# Altium PCB PCB_HDMI_GPIO.PcbDoc
Units mm, origin at the board's own origin, x right, y up, seen from the top; angles counter-clockwise.
Board outline 69.16 x 60.3 mm, 2 copper layers (Top Layer, Bottom Layer); 26 components, 141 nets, 305 pads, 149 vias.
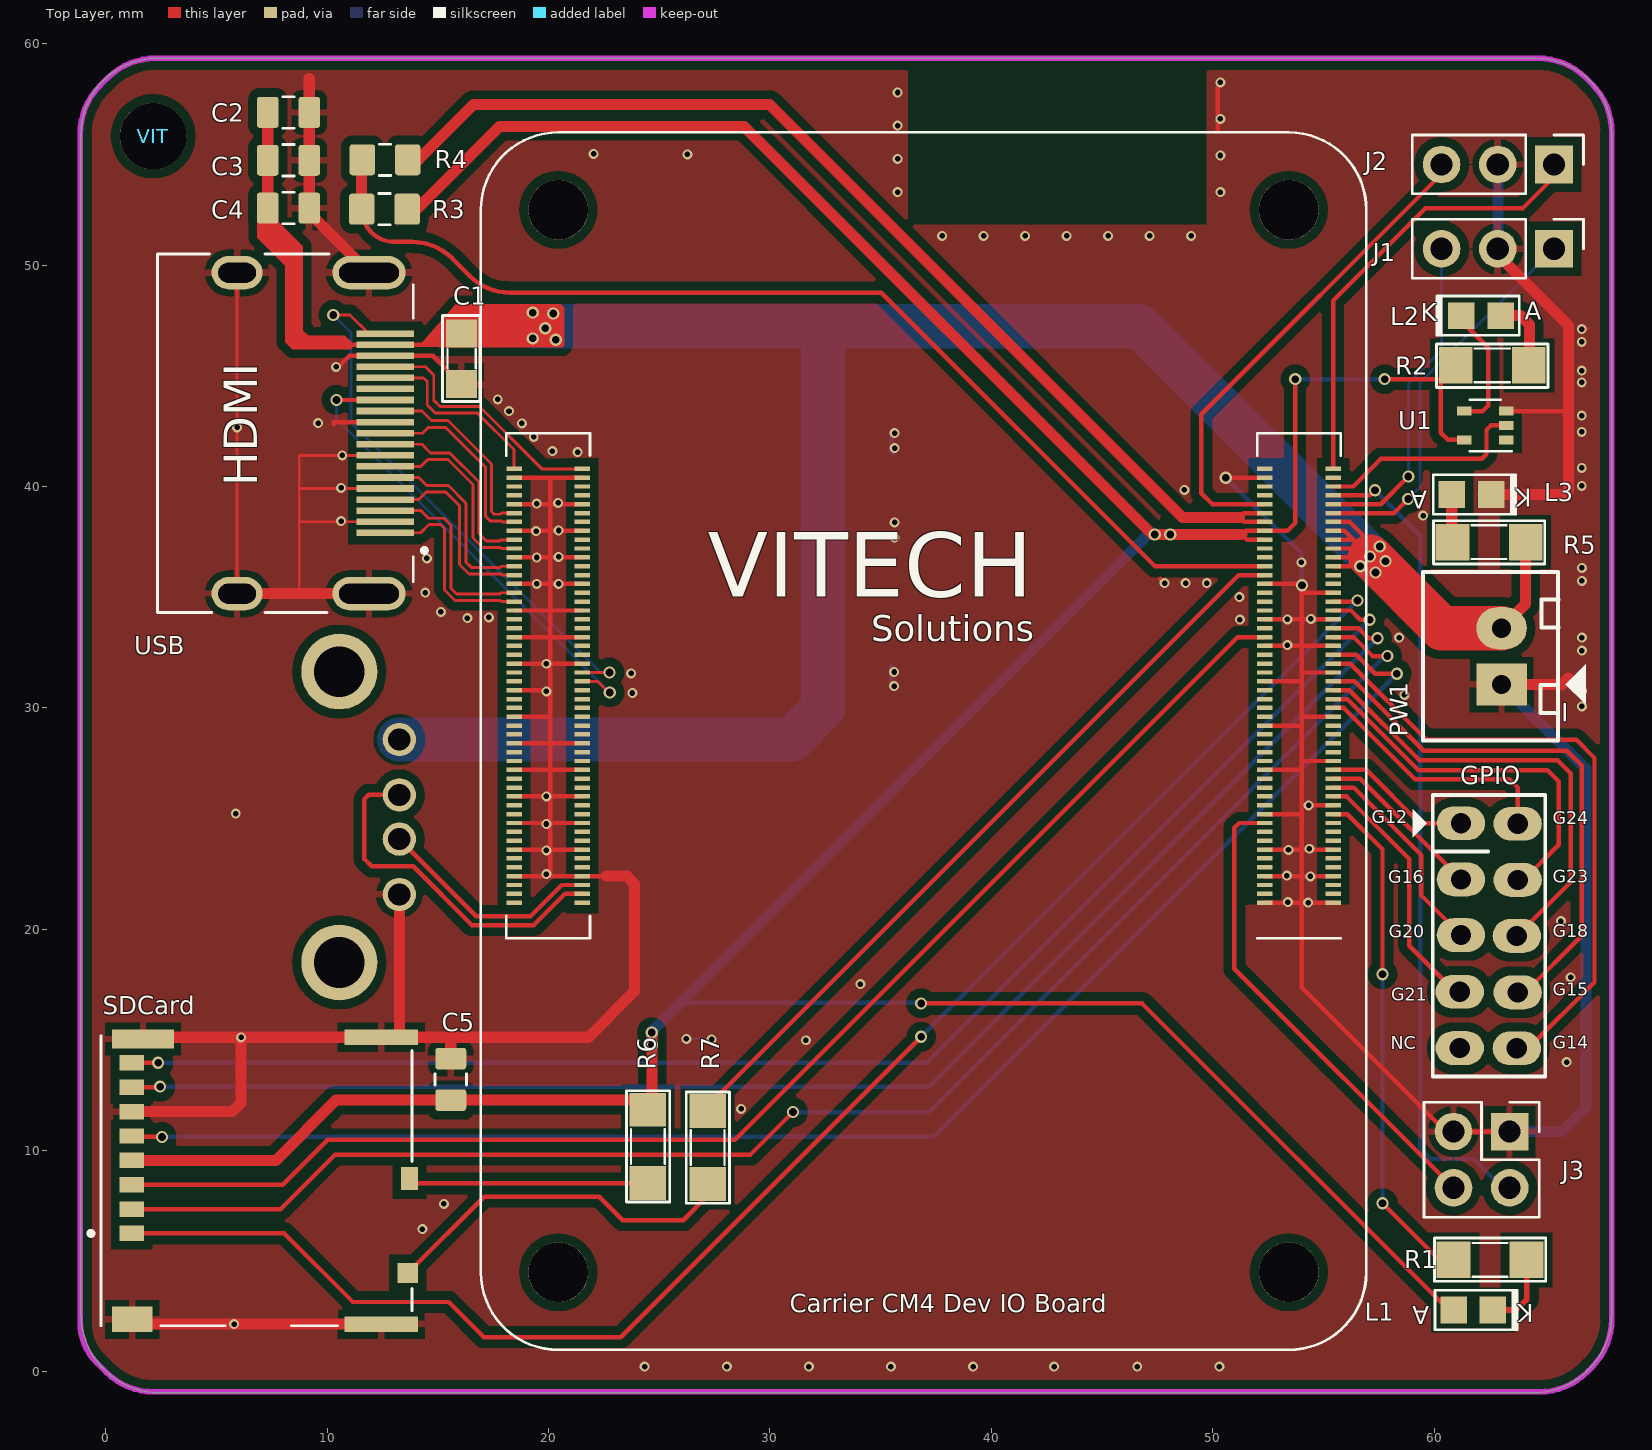
[diagram p0: Top Layer view]
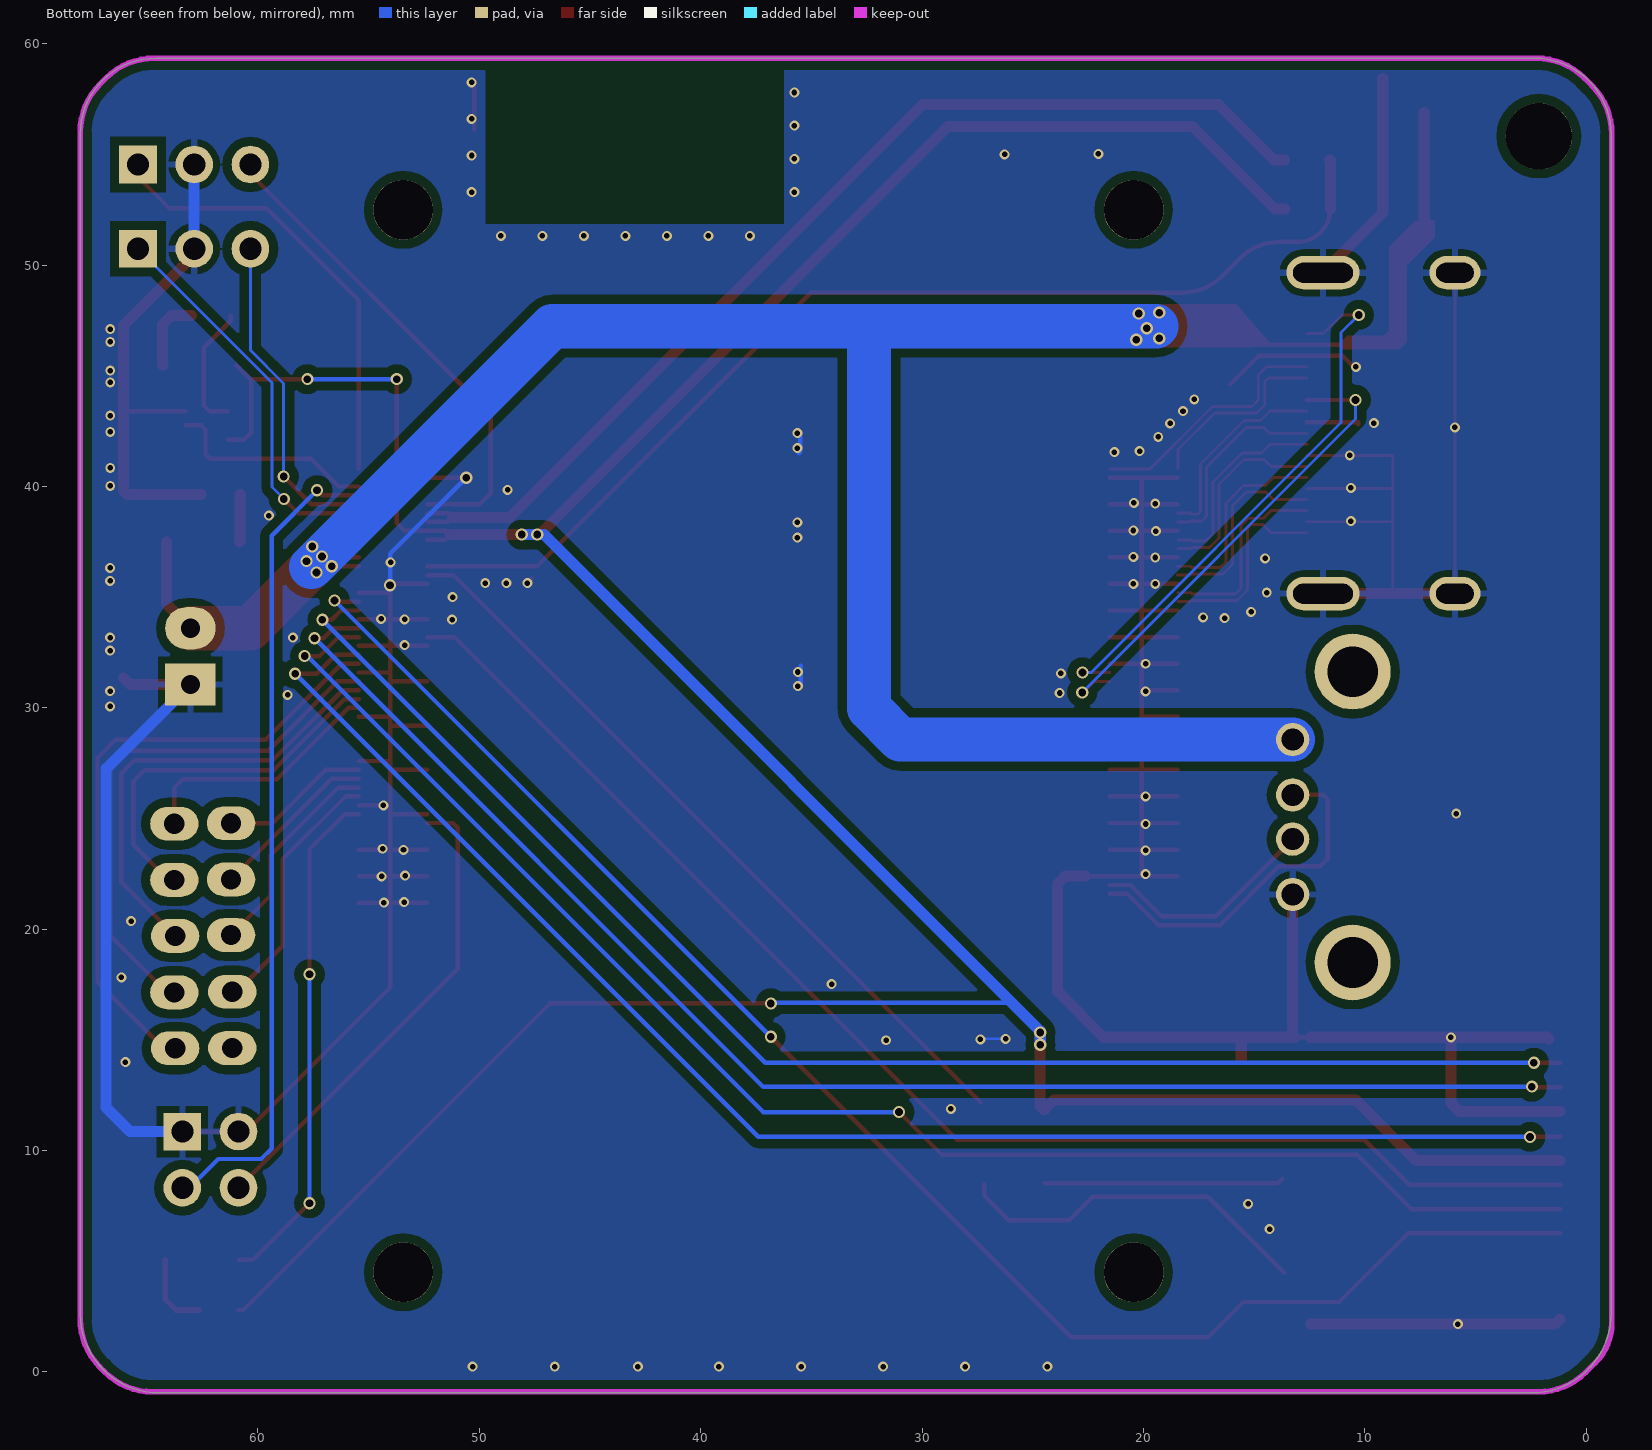
[diagram p1: Bottom Layer view, seen from below]

## Layer stack, top to bottom
Top Solder: solder mask 0.0102, Solder Resist, Dk 3.5
Top Layer: signal copper 0.0356
Dielectric 1: dielectric 0.32, FR-4, Dk 4.8
Bottom Layer: signal copper 0.0356
Bottom Solder: solder mask 0.0102, Solder Resist, Dk 3.5

## Board outline
2.473,-0.949 64.449,-0.949 ccw(c64.449,2.633) 68.03,2.633 68.03,55.922 ccw(c64.601,55.922) 64.601,59.351 2.32,59.351 ccw(c2.32,55.896) -1.134,55.896 -1.134,2.658 ccw(c2.473,2.658)

## Design rules (kind name [scope] priority, off if disabled: settings)
Clearance Clearance_1 [All] p1: gap=0.4
Clearance VCC [InNet('+5V') vs InNet('+5V')] p2: gap=0.3
MatchedLengths CLK_HDMI0 [InNetClass('CLK')] p1: tolerance=2 checknetsindiffpair=FALSE checkdiffpairvsdiffpair=TRUE checkxsignals=TRUE checkothers=TRUE
MatchedLengths D0_P_N [InNetClass('D0_P_N')] p2: tolerance=2 checknetsindiffpair=FALSE checkdiffpairvsdiffpair=TRUE checkxsignals=TRUE checkothers=TRUE
MatchedLengths D1_P_N [InNetClass('D1_P_N')] p3: tolerance=2 checknetsindiffpair=FALSE checkdiffpairvsdiffpair=TRUE checkxsignals=TRUE checkothers=TRUE
MatchedLengths D2_P_N [InNetClass('D2_P_N')] p4: tolerance=2 checknetsindiffpair=FALSE checkdiffpairvsdiffpair=TRUE checkxsignals=TRUE checkothers=TRUE
PolygonConnect Not_Connect_Direct [All vs InComponent('HDMI','C1','C2','C3','C4','C5','SDCard','USB','J1','J2','J3','R3','Module1','PW1')] p1: connectstyle=Relief reliefconductorwidth=0.3 reliefentries=4 polygonreliefangle="90 Angle" airgapwidth=0.3
PolygonConnect vias [All vs isVia] p2: connectstyle=Direct reliefconductorwidth=0.254 reliefentries=4 polygonreliefangle="90 Angle" airgapwidth=0.254
PolygonConnect [IsNamedPolygon('GND') vs IsVia] p3: connectstyle=Relief reliefconductorwidth=0.254 reliefentries=4 polygonreliefangle="90 Angle" airgapwidth=0.254
RoutingVias Via_GND [All] p1: holewidth=0.25 width=0.45 viastyle="Through Hole" minholewidth=0.25 minwidth=0.45 maxholewidth=0.25 maxwidth=0.45
RoutingVias Via_PWR [All] p2: holewidth=0.35 width=0.55 viastyle="Through Hole" minholewidth=0.35 minwidth=0.55 maxholewidth=0.35 maxwidth=0.55
SolderMaskExpansion [All] p1: expansion=0.102
Width [All] p1: maxlimit=2 minlimit=0.13 preferedwidth=0.5
30 further rules are at their usual default settings.

## Classes and differential pairs
net class CLK: HDMI0_CK_N HDMI0_CK_P
net class D0_P_N: HDMI0_D0_N HDMI0_D0_P
net class D1_P_N: HDMI0_D1_N HDMI0_D1_P
net class D2_P_N: HDMI0_D2_N HDMI0_D2_P
net class SDA_SCL: HDMI0_SCL HDMI0_SDA
net class SDCard: SD_CLK SD_CMD SD_DAT0 SD_DAT1 SD_DAT2 SD_DAT3 SD_DET SD_PWR_ON

## Components (designator, comment, footprint, x,y, rotation, side; value= is the part's Value field where it differs from the comment)
C1 "104" SM-CAP-0805 16.069,46.911 r270 top
C2 "10u" C_0805_2012Metric 8.251,56.901 r0 top
C3 "10u" C_0805_2012Metric 8.251,54.741 r0 top
C4 "10u" C_0805_2012Metric 8.251,52.581 r0 top
C5 "10u" C_0805_2012Metric 15.581,13.221 r90 top
"Carrier CM4 Dev IO Board" "ComputeModule4-CM4" Raspberry-Pi-4-Compute-Module 53.441,52.501 r180 top locked (schematic designator Module1)
GPIO "JP5X2" JP5X2 61.201,24.781 r270 top
HDMI "HDMI_A_1.4" HDMI 9.271,42.411 r270 top locked
J1 "Conn_01x03" PinHeader_1x03_P2.54mm_Vertical 65.421,50.741 r270 top
J2 "Conn_01x03" PinHeader_1x03_P2.54mm_Vertical 65.421,54.551 r270 top
J3 "Conn_02x02_Odd_Even" CON2x2 62.147,9.591 r270 top
L1 "RED LED" LED_0805 61.771,2.801 r180 top
L2 "RED LED" LED_0805 62.121,47.721 r0 top
L3 "RED LED" LED_0805 61.691,39.641 r180 top
PW1 "JP2" CON2 63.051,31.061 r90 top
R1 "1k" SM-RES-1206 60.881,5.061 r0 top
R2 "1k" SM-RES-1206 64.281,45.471 r180 top
R3 "0R" R_0805_2012Metric_Pad1.15x1.40mm_HandSolder 12.581,52.531 r180 top
R4 "nf" R_0805_2012Metric_Pad1.15x1.40mm_HandSolder 12.611,54.761 r180 top
R5 "1k" SM-RES-1206 64.141,37.491 r180 top
R6 "1k" SM-RES-1206 24.481,11.841 r270 top
R7 "1k" SM-RES-1206 27.181,11.791 r270 top
SDCard "Micro_SD_Card_Det" SDCARD_MOLEX_503398-1892 6.801,8.641 r90 top
U1 "74LVC1G07_copy" SOT-353_SC-70-5 62.311,42.761 r180 top
USB "USB_Female" USB_Female 11.901,25.071 r270 top
VIT "Comment" VIT 2.134,55.829 r0 top

## Footprints (in the part's own frame and the unit in brackets; to place one, negate y for a bottom-side part, rotate by r counter-clockwise, add the part's x,y. Pads: shape width x height; smd on the part's side, far side on the other; paste and mask are expansions set on the pad)
C_0805_2012Metric [mm]
  rrect25% 0.975x1.4 smd mask+0: 1(-0.937,0) 2(0.937,0)
  silkscreen extent -0.26,-0.71 0.26,0.71
CON2 [mil] "CON2"
  rect 75x90 hole 34: 1(0,0)
  oval 75x90 hole 34: 2(100,0)
  silkscreen extent -100,-150 200,140, body extent -68,-70 168,107, height 236
CON2x2 [mm]
  rect 1.7x1.7 hole 1 paste-1.7: 1(-1.27,1.27)
  rrect100% 1.7x1.7 hole 1 paste-1.7: 2(1.27,1.27) 3(-1.27,-1.27) 4(1.27,-1.27)
  silkscreen extent -2.6,-2.6 2.6,2.6
HDMI [mm]
  rect 0.3x2.6 smd mask+0: 1(4.5,3.345) 2(4,3.345) 3(3.5,3.345) 4(3,3.345) 5(2.5,3.345) 6(2,3.345) 7(1.5,3.345) 8(1,3.345) 9(0.5,3.345) 10(0,3.345) 11(-0.5,3.345) 12(-1,3.345) 13(-1.5,3.345) 14(-2,3.345) 15(-2.5,3.345) 16(-3,3.345) 17(-3.5,3.345) 18(-4,3.345) 19(-4.5,3.345)
  rrect100% 1.5x3.3 hole 2.7 slot 0.9 at 0 deg paste-3.3: SH1(7.25,2.615) SH2(-7.25,2.615)
  rrect100% 1.5x2.3 hole 1.7 slot 0.9 at 0 deg paste-2.3: SH3(-7.25,-3.345) SH4(7.25,-3.345)
  silkscreen extent -8.1,-6.94 8.1,5.22
JP5X2 [mil]
  oval 60x86 hole 36: 1(-0.5,0.5) 2(99.5,0.5) 3(198.5,0.5) 4(299.5,-1.5) 5(399.5,-1.5) 6(0.5,101.5) 7(100.5,101.5) 8(200,100) 9(300.5,101.5) 10(400,100)
  silkscreen extent -51,-85 450,151, body extent -50,-50 450,150, height 335
LED_0805 [mm] "LED"
  rect 1.2x1.2 smd mask+0.076: A(0.889,0) K(-0.889,0)
  silkscreen extent -1.99,-0.89 1.73,0.89, body extent -1.01,-0.62 1.01,0.63, height 1.1
PinHeader_1x03_P2.54mm_Vertical [mm]
  rect 1.7x1.7 hole 1 paste-1.7: 1(0,0)
  rrect100% 1.7x1.7 hole 1 paste-1.7: 2(0,-2.54) 3(0,-5.08)
  silkscreen extent -1.33,-6.41 1.33,1.33
R_0805_2012Metric_Pad1.15x1.40mm_HandSolder [mm]
  rrect22% 1.15x1.4 smd mask+0: 1(-1.025,0) 2(1.025,0)
  silkscreen extent -0.26,-0.71 0.26,0.71
Raspberry-Pi-4-Compute-Module [mm]
  rect 0.7x0.2 smd mask+0: 1(-2,31.3) 2(1.08,31.3) 3(-2,30.9) 4(1.08,30.9) 5(-2,30.5) 6(1.08,30.5) 7(-2,30.1) 8(1.08,30.1) 9(-2,29.7) 10(1.08,29.7) 11(-2,29.3) 12(1.08,29.3) 13(-2,28.9) 14(1.08,28.9) 15(-2,28.5) 16(1.08,28.5) 17(-2,28.1) 18(1.08,28.1) 19(-2,27.7) 20(1.08,27.7) 21(-2,27.3) 22(1.08,27.3) 23(-2,26.9) 24(1.08,26.9) 25(-2,26.5) 26(1.08,26.5) 27(-2,26.1) 28(1.08,26.1) 29(-2,25.7) 30(1.08,25.7) 31(-2,25.3) 32(1.08,25.3) 33(-2,24.9) 34(1.08,24.9) 35(-2,24.5) 36(1.08,24.5) 37(-2,24.1) 38(1.08,24.1) 39(-2,23.7) 40(1.08,23.7) 41(-2,23.3) 42(1.08,23.3) 43(-2,22.9) 44(1.08,22.9) 45(-2,22.5) 46(1.08,22.5) 47(-2,22.1) 48(1.08,22.1) 49(-2,21.7) 50(1.08,21.7) 51(-2,21.3) 52(1.08,21.3) 53(-2,20.9) 54(1.08,20.9) 55(-2,20.5) 56(1.08,20.5) 57(-2,20.1) 58(1.08,20.1) 59(-2,19.7) 60(1.08,19.7) 61(-2,19.3) 62(1.08,19.3) 63(-2,18.9) 64(1.08,18.9) 65(-2,18.5) 66(1.08,18.5) 67(-2,18.1) 68(1.08,18.1) 69(-2,17.7) 70(1.08,17.7) 71(-2,17.3) 72(1.08,17.3) 73(-2,16.9) 74(1.08,16.9) 75(-2,16.5) 76(1.08,16.5) 77(-2,16.1) 78(1.08,16.1) 79(-2,15.7) 80(1.08,15.7) 81(-2,15.3) 82(1.08,15.3) 83(-2,14.9) 84(1.08,14.9) 85(-2,14.5) 86(1.08,14.5) 87(-2,14.1) 88(1.08,14.1) 89(-2,13.7) 90(1.08,13.7) 91(-2,13.3) 92(1.08,13.3) 93(-2,12.9) 94(1.08,12.9) 95(-2,12.5) 96(1.08,12.5) 97(-2,12.1) 98(1.08,12.1) 99(-2,11.7) 100(1.08,11.7) 101(31.92,31.3) 102(35,31.3) 103(31.92,30.9) 104(35,30.9) 105(31.92,30.5) 106(35,30.5) 107(31.92,30.1) 108(35,30.1) 109(31.92,29.7) 110(35,29.7) 111(31.92,29.3) 112(35,29.3) 113(31.92,28.9) 114(35,28.9) 115(31.92,28.5) 116(35,28.5) 117(31.92,28.1) 118(35,28.1) 119(31.92,27.7) 120(35,27.7) 121(31.92,27.3) 122(35,27.3) 123(31.92,26.9) 124(35,26.9) 125(31.92,26.5) 126(35,26.5) 127(31.92,26.1) 128(35,26.1) 129(31.92,25.7) 130(35,25.7) 131(31.92,25.3) 132(35,25.3) 133(31.92,24.9) 134(35,24.9) 135(31.92,24.5) 136(35,24.5) 137(31.92,24.1) 138(35,24.1) 139(31.92,23.7) 140(35,23.7) 141(31.92,23.3) 142(35,23.3) 143(31.92,22.9) 144(35,22.9) 145(31.92,22.5) 146(35,22.5) 147(31.92,22.1) 148(35,22.1) 149(31.92,21.7) 150(35,21.7) 151(31.92,21.3) 152(35,21.3) 153(31.92,20.9) 154(35,20.9) 155(31.92,20.5) 156(35,20.5) 157(31.92,20.1) 158(35,20.1) 159(31.92,19.7) 160(35,19.7) 161(31.92,19.3) 162(35,19.3) 163(31.92,18.9) 164(35,18.9) 165(31.92,18.5) 166(35,18.5) 167(31.92,18.1) 168(35,18.1) 169(31.92,17.7) 170(35,17.7) 171(31.92,17.3) 172(35,17.3) 173(31.92,16.9) 174(35,16.9) 175(31.92,16.5) 176(35,16.5) 177(31.92,16.1) 178(35,16.1) 179(31.92,15.7) 180(35,15.7) 181(31.92,15.3) 182(35,15.3) 183(31.92,14.9) 184(35,14.9) 185(31.92,14.5) 186(35,14.5) 187(31.92,14.1) 188(35,14.1) 189(31.92,13.7) 190(35,13.7) 191(31.92,13.3) 192(35,13.3) 193(31.92,12.9) 194(35,12.9) 195(31.92,12.5) 196(35,12.5) 197(31.92,12.1) 198(35,12.1) 199(31.92,11.7) 200(35,11.7)
  round 2.7 hole 2.7 paste-2.7 mask+1.7: Un1(0,0) Un2(33,48) Un3(33,0) Un4(0,48)
  silkscreen extent -3.5,-3.5 36.5,51.5
SDCARD_MOLEX_503398-1892 [mm]
  rect 0.7x1.1 smd mask+0: 1(-2.38,5.625) 2(-1.28,5.625) 3(-0.18,5.625) 4(0.92,5.625) 5(2.02,5.625) 6(3.12,5.625) 7(4.22,5.625) 8(5.32,5.625)
  rect 0.9x0.93 smd mask+0: 9(-4.17,-6.84)
  rect 1.05x0.78 smd mask+0: 10(0.095,-6.915)
  rect 0.7x3.33 smd mask+0: 11(-6.48,-5.64) 11(6.48,-5.64)
  rect 1.14x1.83 smd mask+0: 11(-6.26,5.61)
  rect 0.86x2.8 smd mask+0: 11(6.4,5.125)
  silkscreen extent -6.55,-7.02 6.55,7.57
SM-CAP-0805 [mil]
  rect 50x55 smd: 1(0,0) 2(90,0)
  silkscreen extent -32,-34 121,33, body extent 6,-25 84,25, height 31
SM-RES-1206 [mil]
  rect 60x65 smd: 1(0,0) 2(130,0)
  silkscreen extent -34,-38 164,39, body extent 2,-31 128,32, height 40
SOT-353_SC-70-5 [mm]
  rect 0.65x0.4 smd mask+0: 1(-0.95,0.65) 2(-0.95,0) 3(-0.95,-0.65) 4(0.95,-0.65) 5(0.95,0.65)
  silkscreen extent -1.2,-1.16 0.7,1.16
USB_Female [mm]
  round 1.508 / inner round 0 / far side round 1.508 hole 1: D+(1,1.355) D-(-1,1.355) GND(3.5,1.355) VBUS(-3.5,1.355)
  round 3.429 / inner round 0 / far side round 3.429 hole 2.286: P1(-6.57,-1.355) P22(6.57,-1.355)
VIT [mm] "VIT"
  round 3 hole 3: VIT1(0,0)

## Part data
C1: library part CN
C2 C3 C4 C5: library part C
L1 L2 L3: library part LED-RED_10mA-0805, "Red 621nm LED Indication - Discrete 2V 0805 (2012 Metric)"
PW1: library part Con2, "Connector 2"
R1 R2 R5 R6 R7: library part R, "Resistor 1/4W"
R3 R4: library part R

## Via types
v1: diameter 0.45, hole 0.25, Top Layer to Bottom Layer, tented both sides, 111 vias
v2: diameter 0.55, hole 0.35, Top Layer to Bottom Layer, tented both sides, 38 vias

## Nets (pads, with @x,y where several pads share a name; then routed paths per layer and width w, separated by ;. In a path a pad name is that pad's centre, name@x,y a point inside that pad or via, vN(x,y) a via of type N, cw(c..) or ccw(c..) an arc to the next point about the centre after c; other vN are vias at no path point)
+1.8V: "Carrier CM4 Dev IO Board.88" "Carrier CM4 Dev IO Board.90" R4.1 | length 48.8
  Top Layer w0.2: 52.361,38.401 51.401,38.401 51.201,38.601 51.401,38.801 52.361,38.801
  Top Layer w0.5: R4.1 14.111,54.761 16.601,57.251 29.981,57.251 48.631,38.601 51.201,38.601
+3.3V: "Carrier CM4 Dev IO Board.84" "Carrier CM4 Dev IO Board.86" C5.1 L1.A R2.2 R3.1 R6.1 SDCard.4 U1.5 | length 173.9
  Top Layer w0.2: v2@36.961,16.651 46.811,16.651 60.661,2.801 L1.A ; 52.361,37.601 51.551,37.601 51.321,37.831 51.491,38.001 52.361,38.001 53.376,38.001 53.728,38.353 v2(53.728,44.853) v2@53.728,44.913 ; v2(57.769,44.853) 60.361,44.853 R2.2 60.305,44.797 60.305,42.437 60.631,42.111 U1.5
  Top Layer w0.5: SDCard.4 7.681,9.561 10.403,12.284 C5.1 24.038,12.284 R6.1 24.681,12.041 v2@24.681,15.341 ; R3.1 14.051,52.531 17.791,56.271 28.831,56.271 47.271,37.831 v2(48.081,37.831) 51.321,37.831
  Bottom Layer w0.2: v2(24.661,14.781) 24.661,15.371 25.961,16.671 36.811,16.671 v2(36.831,16.651) v2@36.961,16.651 ; v2(53.728,44.853) v2(57.769,44.853)
  Bottom Layer w0.5: v2(24.661,14.781) v2(24.661,15.341) 24.661,15.411 47.081,37.831 v2(48.081,37.831)
  other v2: 47.381,37.831
+5V: "Carrier CM4 Dev IO Board.77" "Carrier CM4 Dev IO Board.79" "Carrier CM4 Dev IO Board.81" "Carrier CM4 Dev IO Board.83" "Carrier CM4 Dev IO Board.85" "Carrier CM4 Dev IO Board.87" C1.1 C2.1 C3.1 C4.1 HDMI.18 PW1.2 R5.1 USB.VBUS | length 117.7
  Top Layer w0.2: 10.871,46.411 HDMI.18 C1.1@15.714,46.411 ; 55.441,36.401 v2(56.671,36.401) v2@57.071,36.801 ; 55.441,36.801 v2@57.071,36.801 ; 55.441,37.201 56.751,37.201 ; 55.441,37.601 56.351,37.601 ; 55.441,38.001 55.951,38.001 56.351,37.601 ; 55.441,38.401 56.191,38.401 57.301,37.291 v2(57.551,37.291) 57.551,37.281 v2(57.111,36.841) ; 56.351,37.601 56.751,37.201 ; 56.751,37.201 v2(57.111,36.841) ; v2@57.071,36.801 v2(57.111,36.841)
  Top Layer w0.5: C2.1 C3.1 C4.1 7.313,51.757 ccw(c8.227,51.757) 7.314,51.738 ccw(c8.227,51.757) 7.581,51.111 8.251,50.441 cw(c7.432,49.621) 8.591,49.621 8.591,46.851 ; PW1.2 64.141,34.691 R5.1
  Top Layer w2: v2(57.111,36.841) 60.351,33.601 PW1.2
  Bottom Layer w2: USB.VBUS 30.986,28.571 32.392,29.977 32.392,47.245 ; 19.421,47.245 32.392,47.245 ; 57.591,36.361 46.707,47.245 32.392,47.245
  other v2: 57.361,36.121 57.811,36.631 20.324,46.634 19.286,46.695 19.846,47.153 20.212,47.815 19.286,47.856
AIN0: "Carrier CM4 Dev IO Board.96"
AIN1: "Carrier CM4 Dev IO Board.94"
BT_NDIS: "Carrier CM4 Dev IO Board.91" J1.3 | length 14.8
  Top Layer w0.2: 55.441,39.201 57.591,39.201 v2(58.841,40.451)
  Bottom Layer w0.13: v2(58.841,40.451) 58.841,44.658 60.341,46.158 J1.3
CAM0_C_N: "Carrier CM4 Dev IO Board.140"
CAM0_C_P: "Carrier CM4 Dev IO Board.142"
CAM0_D0_N: "Carrier CM4 Dev IO Board.128"
CAM0_D0_P: "Carrier CM4 Dev IO Board.130"
CAM0_D1_N: "Carrier CM4 Dev IO Board.134"
CAM0_D1_P: "Carrier CM4 Dev IO Board.136"
CAM1_C_N: "Carrier CM4 Dev IO Board.127"
CAM1_C_P: "Carrier CM4 Dev IO Board.129"
CAM1_D0_N: "Carrier CM4 Dev IO Board.115"
CAM1_D0_P: "Carrier CM4 Dev IO Board.117"
CAM1_D1_N: "Carrier CM4 Dev IO Board.121"
CAM1_D1_P: "Carrier CM4 Dev IO Board.123"
CAM1_D2_N: "Carrier CM4 Dev IO Board.133"
CAM1_D2_P: "Carrier CM4 Dev IO Board.135"
CAM1_D3_N: "Carrier CM4 Dev IO Board.139"
CAM1_D3_P: "Carrier CM4 Dev IO Board.141"
DSI0_C_N: "Carrier CM4 Dev IO Board.169"
DSI0_C_P: "Carrier CM4 Dev IO Board.171"
DSI0_D0_N: "Carrier CM4 Dev IO Board.157"
DSI0_D0_P: "Carrier CM4 Dev IO Board.159"
DSI0_D1_N: "Carrier CM4 Dev IO Board.163"
DSI0_D1_P: "Carrier CM4 Dev IO Board.165"
DSI1_C_N: "Carrier CM4 Dev IO Board.187"
DSI1_C_P: "Carrier CM4 Dev IO Board.189"
DSI1_D0_N: "Carrier CM4 Dev IO Board.175"
DSI1_D0_P: "Carrier CM4 Dev IO Board.177"
DSI1_D1_N: "Carrier CM4 Dev IO Board.181"
DSI1_D1_P: "Carrier CM4 Dev IO Board.183"
DSI1_D2_N: "Carrier CM4 Dev IO Board.193"
DSI1_D2_P: "Carrier CM4 Dev IO Board.195"
DSI1_D3_N: "Carrier CM4 Dev IO Board.194"
DSI1_D3_P: "Carrier CM4 Dev IO Board.196"
EEPROM_NWP: "Carrier CM4 Dev IO Board.20" J3.4 | length 21.8
  Top Layer w0.2: 52.361,24.801 51.201,24.801 50.981,24.581 50.981,18.217 J3.4
ETH_LEDG: "Carrier CM4 Dev IO Board.15"
ETH_LEDY: "Carrier CM4 Dev IO Board.17"
GLOBAL_EN: "Carrier CM4 Dev IO Board.99" J2.1 | length 20.5
  Top Layer w0.2: 55.441,40.801 55.441,48.394 59.628,52.581 64.021,52.581 65.421,53.981 J2.1
GND: "Carrier CM4 Dev IO Board.1" "Carrier CM4 Dev IO Board.2" "Carrier CM4 Dev IO Board.7" "Carrier CM4 Dev IO Board.8" "Carrier CM4 Dev IO Board.13" "Carrier CM4 Dev IO Board.14" "Carrier CM4 Dev IO Board.22" "Carrier CM4 Dev IO Board.23" "Carrier CM4 Dev IO Board.32" "Carrier CM4 Dev IO Board.33" "Carrier CM4 Dev IO Board.42" "Carrier CM4 Dev IO Board.43" "Carrier CM4 Dev IO Board.52" "Carrier CM4 Dev IO Board.53" "Carrier CM4 Dev IO Board.59" "Carrier CM4 Dev IO Board.60" "Carrier CM4 Dev IO Board.65" "Carrier CM4 Dev IO Board.66" "Carrier CM4 Dev IO Board.71" "Carrier CM4 Dev IO Board.74" "Carrier CM4 Dev IO Board.98" "Carrier CM4 Dev IO Board.107" "Carrier CM4 Dev IO Board.108" "Carrier CM4 Dev IO Board.113" "Carrier CM4 Dev IO Board.114" "Carrier CM4 Dev IO Board.119" "Carrier CM4 Dev IO Board.120" "Carrier CM4 Dev IO Board.125" "Carrier CM4 Dev IO Board.126" "Carrier CM4 Dev IO Board.131" "Carrier CM4 Dev IO Board.132" "Carrier CM4 Dev IO Board.137" "Carrier CM4 Dev IO Board.138" "Carrier CM4 Dev IO Board.144" "Carrier CM4 Dev IO Board.150" "Carrier CM4 Dev IO Board.155" "Carrier CM4 Dev IO Board.156" "Carrier CM4 Dev IO Board.161" "Carrier CM4 Dev IO Board.162" "Carrier CM4 Dev IO Board.167" "Carrier CM4 Dev IO Board.168" "Carrier CM4 Dev IO Board.173" "Carrier CM4 Dev IO Board.174" "Carrier CM4 Dev IO Board.179" "Carrier CM4 Dev IO Board.180" "Carrier CM4 Dev IO Board.185" "Carrier CM4 Dev IO Board.186" "Carrier CM4 Dev IO Board.191" "Carrier CM4 Dev IO Board.192" "Carrier CM4 Dev IO Board.197" "Carrier CM4 Dev IO Board.198" C1.2 C2.2 C3.2 C4.2 C5.2 HDMI.2 HDMI.5 HDMI.8 HDMI.11 HDMI.17 HDMI.SH1 HDMI.SH2 HDMI.SH3 HDMI.SH4 J1.2 J2.2 J3.1 J3.3 L3.K PW1.1 SDCard.6 SDCard.11 U1.3 USB.GND | length 304.3
  Top Layer w0.13: HDMI.SH4 v1(5.926,42.672) HDMI.SH3 ; 8.738,35.161 8.738,38.372 ; HDMI.2 8.777,38.411 8.738,38.372 ; HDMI.5 8.785,39.911 8.738,39.864 ; HDMI.8 v1(10.679,41.411) 8.742,41.411 8.738,41.407 8.738,39.864 ; 8.738,38.372 8.738,39.864
  Top Layer w0.2: 10.296,42.815 10.296,42.911 HDMI.11 ; 10.626,45.533 11.004,45.911 HDMI.17 14.783,45.911 C1.2 ; SDCard.11@12.441,15.121 13.161,15.121 SDCard.11@13.256,15.216 ; v1@14.427,35.179 v1(14.427,35.204) ; 18.441,22.401 v1@20.071,22.401 ; 18.441,23.601 v1@20.071,23.601 ; 18.441,24.801 v1@20.071,24.801 ; 18.441,26.001 v1@20.071,26.001 ; 18.441,27.201 20.071,27.201 ; 18.441,28.401 20.071,28.401 ; 18.441,29.601 20.021,29.601 cw(c20.021,29.551) 20.071,29.551 ; 18.441,30.801 20.021,30.801 cw(c20.021,30.751) v1@20.071,30.751 ; 18.441,32.001 v1@20.071,32.001 ; 18.441,33.201 20.071,33.201 ; 18.441,34.401 20.071,34.401 ; 18.441,35.601 20.071,35.601 ; 18.441,36.801 20.071,36.801 ; 18.441,38.001 20.071,38.001 ; 18.441,39.201 20.071,39.201 ; 18.441,40.401 20.072,40.401 ; 21.521,23.601 v1@20.071,23.601 ; 21.521,24.801 v1@20.071,24.801 ; 21.521,26.001 v1@20.071,26.001 ; 21.521,27.201 20.071,27.201 ; 21.521,28.401 20.071,28.401 ; 21.521,32.001 v1@20.071,32.001 ; 21.521,33.201 20.071,33.201 ; 21.521,34.401 20.071,34.401 ; 21.521,35.601 20.071,35.601 ; 21.521,36.801 20.071,36.801 ; 21.521,38.001 20.071,38.001 ; 21.521,39.201 20.071,39.201 ; 21.521,40.401 20.072,40.401 ; 22.611,22.401 21.521,22.401 v1@20.071,22.401 ; 47.625,35.839 v1(47.828,35.636) ; v1@48.717,39.751 v1(48.717,39.853) ; v1@49.733,35.761 v1@49.835,35.761 ; 50.227,56.125 50.227,58.03 v1@50.455,58.259 ; v2(50.591,40.401) 52.361,40.401 ; 52.361,21.201 54.021,21.201 ; 52.361,22.401 54.021,22.401 ; 52.361,23.601 54.021,23.601 ; 52.361,25.201 54.021,25.201 ; 52.361,27.201 53.981,27.201 ; 52.361,29.201 53.991,29.201 54.021,29.171 ; 52.361,31.201 53.931,31.201 54.021,31.111 ; 52.361,32.801 54.021,32.801 ; 52.361,34.001 54.021,34.001 ; 52.361,35.601 v2@54.021,35.601 ; v2@54.021,35.541 54.021,35.201 ; 55.441,21.201 54.021,21.201 ; 55.441,22.401 54.021,22.401 ; 55.441,23.601 54.021,23.601 ; 55.441,25.601 54.031,25.601 54.021,25.611 ; 55.441,27.601 54.061,27.601 54.021,27.561 ; 55.441,29.601 54.031,29.601 54.021,29.591 ; 55.441,31.601 54.061,31.601 54.021,31.561 ; 55.441,32.801 54.021,32.801 ; 55.441,34.001 54.021,34.001 ; 55.441,35.201 54.021,35.201 ; v1(58.42,33.172) v1@58.42,33.198 ; v1@58.547,30.683 58.639,30.591 v1(58.656,30.591) v1@58.716,30.531 ; v1@59.436,38.659 59.487,38.659 v1(59.512,38.684) v1@59.588,38.608 ; U1.3 65.792,43.411 ; J3.1 J3.3 60.531,10.861 54.021,17.371 54.021,21.201 ; v1@66.548,47.117 v1@66.878,47.117 ; v1@20.071,22.401 v1@20.071,23.601 ; v1@20.071,23.601 v1@20.071,24.801 ; v1@20.071,24.801 v1@20.071,26.001 ; v1@20.071,26.001 20.071,27.201 ; 20.071,27.201 20.071,28.401 ; 20.071,28.401 20.071,29.551 ; 20.071,29.551 v1@20.071,30.751 ; v1@20.071,30.751 v1@20.071,32.001 ; v1@20.071,32.001 20.071,33.201 ; 20.071,33.201 20.071,34.401 ; 20.071,34.401 20.071,35.601 ; 20.071,35.601 20.071,36.801 ; 20.071,36.801 20.071,38.001 ; 20.071,38.001 20.071,39.201 ; 20.071,39.201 20.071,40.4 20.072,40.401 ; 54.021,21.201 54.021,22.401 ; 54.021,22.401 54.021,23.601 ; 54.021,23.601 54.021,25.201 ; 54.021,25.201 54.021,25.611 ; 54.021,25.611 54.021,27.561 ; 54.021,27.561 54.021,29.171 ; 54.021,29.171 54.021,29.591 ; 54.021,29.591 54.021,31.111 ; 54.021,31.111 54.021,31.561 ; 54.021,31.561 54.021,32.801 ; 54.021,32.801 54.021,34.001 ; 54.021,34.001 54.021,35.201
  Top Layer w0.5: SDCard.6 5.711,11.761 6.111,12.161 v1(6.111,15.121) ; SDCard.11@1.191,2.381 1.411,2.161 v1(5.791,2.161) SDCard.11@12.441,2.161 ; SDCard.11@1.676,15.041 1.756,15.121 v1(6.111,15.121) ; HDMI.SH4 8.738,35.161 HDMI.SH1 ; 9.188,58.434 C2.2 C3.2 C4.2 9.188,52.359 HDMI.SH2 ; SDCard.11@12.441,15.121 v1(6.111,15.121) ; SDCard.11@13.161,15.121 15.411,15.121 ; SDCard.11@13.256,15.216 USB.GND ; C5.2 15.581,14.951 15.411,15.121 ; 22.611,22.401 23.531,22.401 23.881,22.051 23.881,17.201 21.801,15.121 15.411,15.121 ; L3.K 65.911,39.641 66.071,39.801 66.071,47.281 62.881,50.471 J1.2 ; PW1.1 65.771,31.061 66.071,31.361
  Bottom Layer w0.13: v1(26.222,15.053) 27.339,15.053 v1(27.365,15.028)
  Bottom Layer w0.2: 35.486,31.902 35.486,30.988 v1@35.537,30.937 ; v1@35.511,42.418 35.511,41.554 35.562,41.504 ; v1@42.759,0.37 v1@42.81,0.37 ; v2(50.591,40.401) 54.031,36.961 v2(54.031,35.541)
  Bottom Layer w0.5: J1.2 J2.2 ; PW1.1 66.861,27.251 66.861,11.941 65.781,10.861 J3.1
  other v1: 24.342,0.245 28.051,0.245 31.759,0.245 35.467,0.245 39.176,0.245 42.833,0.245 46.593,0.245 50.301,0.245 14.3,6.452 15.265,7.595 28.702,11.887 65.989,13.995 31.623,14.986 34.087,17.526 66.167,17.831 65.735,20.371 54.314,21.2 53.4,21.225 54.416,22.394 53.349,22.419 19.897,22.495 19.897,23.562 53.425,23.588 54.365,23.638 19.897,24.756 5.867,25.222 54.34,25.594 19.897,26.001 66.675,30.074 23.783,30.674 19.897,30.75 66.675,30.759 35.611,30.988 23.733,31.563 35.611,31.623 19.897,31.995 66.675,32.588 53.374,32.833 66.675,33.172 51.232,33.985 53.374,34.002 54.441,34.027 16.332,34.061 17.297,34.087 15.138,34.341 51.206,35.001 19.465,35.602 20.456,35.602 48.781,35.636 49.733,35.636 66.675,35.738 66.675,36.322 54.009,36.573 14.503,36.754 19.465,36.796 20.456,36.821 35.636,37.694 19.44,37.989 20.456,38.015 35.636,38.379 10.628,38.439 19.465,39.234 20.431,39.259 10.628,39.938 66.673,40.03 66.673,40.843 21.311,41.554 20.168,41.605 35.636,41.732 19.329,42.24 35.636,42.418 66.673,42.469 18.796,42.85 9.585,42.866 66.673,43.205 18.212,43.409 17.704,43.942 66.673,44.704 66.673,45.237 10.398,45.406 66.673,46.533 66.673,47.117 37.779,51.324 39.654,51.324 41.53,51.324 43.405,51.324 45.28,51.324 47.156,51.324 49.031,51.324 35.772,53.306 50.352,53.306 35.772,54.804 50.352,54.957 26.273,55.007 22.031,55.033 35.772,56.303 50.352,56.608 35.772,57.801 50.352,58.259
GPIO2: "Carrier CM4 Dev IO Board.58"
GPIO3: "Carrier CM4 Dev IO Board.56"
GPIO4: "Carrier CM4 Dev IO Board.54"
GPIO5: "Carrier CM4 Dev IO Board.34"
GPIO6: "Carrier CM4 Dev IO Board.30"
GPIO7: "Carrier CM4 Dev IO Board.37"
GPIO8: "Carrier CM4 Dev IO Board.39"
GPIO9: "Carrier CM4 Dev IO Board.40"
GPIO10: "Carrier CM4 Dev IO Board.44"
GPIO11: "Carrier CM4 Dev IO Board.38"
GPIO12: "Carrier CM4 Dev IO Board.31" GPIO.1 | length 6.8
  Top Layer w0.2: 55.441,27.201 56.941,27.201 59.348,24.794 GPIO.1
GPIO13: "Carrier CM4 Dev IO Board.28"
GPIO14: "Carrier CM4 Dev IO Board.55" GPIO.10 | length 28.5
  Top Layer w0.2: 55.441,32.001 56.221,32.001 59.651,28.571 66.421,28.571 67.251,27.741 67.251,17.611 64.261,14.621 GPIO.10
GPIO15: "Carrier CM4 Dev IO Board.51" GPIO.9 | length 24.4
  Top Layer w0.2: 55.441,31.201 56.411,31.201 59.541,28.071 66.001,28.071 66.671,27.401 66.671,19.711 64.108,17.148 GPIO.9
GPIO16: "Carrier CM4 Dev IO Board.29" GPIO.2 | length 7.7
  Top Layer w0.2: 55.441,26.801 56.666,26.801 GPIO.2
GPIO17: "Carrier CM4 Dev IO Board.50"
GPIO18: "Carrier CM4 Dev IO Board.49" GPIO.8 | length 20.6
  Top Layer w0.2: 55.441,30.801 56.171,30.801 59.341,27.631 65.581,27.631 66.171,27.041 66.171,22.131 GPIO.8
GPIO19: "Carrier CM4 Dev IO Board.26"
GPIO20: "Carrier CM4 Dev IO Board.27" GPIO.3 | length 9.6
  Top Layer w0.2: 55.441,26.401 56.371,26.401 59.431,23.341 59.431,21.522 GPIO.3
GPIO21: "Carrier CM4 Dev IO Board.25" GPIO.4 | length 11.7
  Top Layer w0.2: 55.441,26.001 56.051,26.001 58.881,23.171 58.881,19.251 60.958,17.174 GPIO.4
GPIO22: "Carrier CM4 Dev IO Board.46"
GPIO23: "Carrier CM4 Dev IO Board.47" GPIO.7 | length 17.1
  Top Layer w0.2: 55.441,30.401 56.076,30.401 59.286,27.191 65.111,27.191 65.631,26.671 65.631,23.821 64.038,22.228 GPIO.7
GPIO24: "Carrier CM4 Dev IO Board.45" GPIO.6 | length 11.5
  Top Layer w0.2: 55.441,30.001 55.921,30.001 59.141,26.781 63.401,26.781 63.779,26.403 GPIO.6
GPIO25: "Carrier CM4 Dev IO Board.41"
GPIO26: "Carrier CM4 Dev IO Board.24"
GPIO27: "Carrier CM4 Dev IO Board.48"
GPIO_VREF: "Carrier CM4 Dev IO Board.78" R3.2 R4.2 | length 49.7
  Top Layer w0.2: R3.2 ccw(c13.036,52.531) 11.574,52.298 ccw(c13.036,52.531) 12.802,51.07 ccw(c13.036,52.531) 13.036,51.051 13.849,51.051 cw(c13.849,48.511) 14.23,51.022 cw(c13.849,48.511) 15.645,50.307 16.447,49.505 ccw(c18.243,51.301) 18.243,48.761 35.031,48.761 47.391,36.401 52.361,36.401
  Top Layer w0.5: R3.2 11.556,54.731 R4.2
HDMI0_CEC: "Carrier CM4 Dev IO Board.151" HDMI.13 | length 22
  Top Layer w0.13: 21.521,31.201 22.207,31.201 22.706,30.702 v2(22.766,30.702)
  Top Layer w0.2: v2(10.416,43.915) 10.42,43.911 HDMI.13
  Bottom Layer w0.13: v2(10.416,43.915) 10.416,43.052 v2(22.766,30.702)
HDMI0_CK_N: "Carrier CM4 Dev IO Board.190" HDMI.12 | length 9.1
  Top Layer w0.13: HDMI.12 14.275,43.411 14.705,42.981 15.458,42.981 17.426,41.013 17.426,38.868 17.544,38.75 17.824,38.75 17.871,38.797 18.463,38.797
HDMI0_CK_P: "Carrier CM4 Dev IO Board.188" HDMI.10 | length 9
  Top Layer w0.13: HDMI.10 14.301,42.411 14.563,42.673 15.358,42.673 17.142,40.889 17.142,38.664 17.354,38.452 17.837,38.452 17.892,38.397 18.463,38.397
HDMI0_D0_N: "Carrier CM4 Dev IO Board.184" HDMI.9 | length 9
  Top Layer w0.13: HDMI.9 14.283,41.911 14.671,41.523 15.537,41.523 16.849,40.211 16.849,37.885 17.187,37.547 17.805,37.547 17.852,37.594 18.444,37.594
HDMI0_D0_P: "Carrier CM4 Dev IO Board.182" HDMI.7 | length 9
  Top Layer w0.13: HDMI.7 14.224,40.911 14.538,41.225 15.45,41.225 16.589,40.086 16.589,37.67 17.01,37.249 17.818,37.249 17.873,37.194 18.444,37.194
HDMI0_D1_N: "Carrier CM4 Dev IO Board.178" HDMI.6 | length 9.1
  Top Layer w0.13: HDMI.6 14.131,40.411 14.497,40.045 15.473,40.045 16.275,39.243 16.275,36.58 16.504,36.351 17.834,36.351 17.881,36.398 18.473,36.398
HDMI0_D1_P: "Carrier CM4 Dev IO Board.176" HDMI.4 | length 9.1
  Top Layer w0.13: HDMI.4 14.137,39.411 14.475,39.749 15.353,39.749 15.973,39.129 15.973,36.479 16.399,36.053 17.847,36.053 17.902,35.998 18.473,35.998
HDMI0_D2_N: "Carrier CM4 Dev IO Board.172" HDMI.3 | length 9.1
  Top Layer w0.13: HDMI.3 14.238,38.911 14.581,38.568 15.273,38.568 15.597,38.244 15.597,35.393 15.836,35.154 17.802,35.154 17.849,35.201 18.441,35.201
HDMI0_D2_P: "Carrier CM4 Dev IO Board.170" HDMI.1 | length 9.1
  Top Layer w0.13: HDMI.1 14.224,37.911 14.601,38.288 15.118,38.288 15.294,38.112 15.294,35.328 15.766,34.856 17.815,34.856 17.87,34.801 18.441,34.801
HDMI0_HOTPLUG: "Carrier CM4 Dev IO Board.153" HDMI.19 | length 25.5
  Top Layer w0.13: v2(10.272,47.754) 11.03,47.754 11.873,46.911 HDMI.19 ; 21.521,31.601 v2(22.749,31.601)
  Bottom Layer w0.13: v2(10.272,47.754) 11.069,46.957 11.069,42.889 22.357,31.601 v2(22.749,31.601)
HDMI0_SCL: "Carrier CM4 Dev IO Board.200" HDMI.15 | length 8.7
  Top Layer w0.13: HDMI.15 14.349,44.911 14.517,44.743 14.517,43.685 14.887,43.315 16.793,43.315 18.441,41.667 18.441,40.801
HDMI0_SDA: "Carrier CM4 Dev IO Board.199" HDMI.16 | length 11.5
  Top Layer w0.13: HDMI.16 14.442,45.411 14.813,45.04 14.813,43.898 15.1,43.611 16.877,43.611 19.687,40.801 21.521,40.801
HDMI1_CEC: "Carrier CM4 Dev IO Board.149"
HDMI1_CK_N: "Carrier CM4 Dev IO Board.166"
HDMI1_CK_P: "Carrier CM4 Dev IO Board.164"
HDMI1_D0_N: "Carrier CM4 Dev IO Board.160"
HDMI1_D0_P: "Carrier CM4 Dev IO Board.158"
HDMI1_D1_N: "Carrier CM4 Dev IO Board.154"
HDMI1_D1_P: "Carrier CM4 Dev IO Board.152"
HDMI1_D2_N: "Carrier CM4 Dev IO Board.148"
HDMI1_D2_P: "Carrier CM4 Dev IO Board.146"
HDMI1_HOTPLUG: "Carrier CM4 Dev IO Board.143"
HDMI1_SCL: "Carrier CM4 Dev IO Board.147"
HDMI1_SDA: "Carrier CM4 Dev IO Board.145"
ID_SC: "Carrier CM4 Dev IO Board.35"
ID_SD: "Carrier CM4 Dev IO Board.36"
NetL1_K: L1.K R1.2 | length 3.5
  Top Layer w0.254: L1.K 63.711,2.801 64.183,3.273 R1.2
NetL2_A: L2.A R2.1 | length 3.3
  Top Layer w0.5: L2.A 63.911,47.721 64.311,47.321 64.311,45.501 R2.1
NetL2_K: L2.K U1.4 | length 5.8
  Top Layer w0.2: L2.K 61.232,47.49 62.451,46.271 62.451,43.661 62.201,43.411 U1.4
NetL3_A: L3.A R5.2 | length 2.2
  Top Layer w0.5: L3.A 60.802,37.528 R5.2
NetModule1_21: "Carrier CM4 Dev IO Board.21" R1.1 | length 23.1
  Top Layer w0.2: 55.441,25.201 56.081,25.201 57.671,23.611 v2(57.671,17.971) ; v2(57.671,7.621) 60.231,5.061 R1.1
  Bottom Layer w0.2: v2(57.671,7.621) v2(57.671,17.971)
NetModule1_80: "Carrier CM4 Dev IO Board.80"
NetModule1_82: "Carrier CM4 Dev IO Board.82"
NetModule1_97: "Carrier CM4 Dev IO Board.97"
NetModule1_100: "Carrier CM4 Dev IO Board.100"
NetModule1_101: "Carrier CM4 Dev IO Board.101"
NetModule1_102: "Carrier CM4 Dev IO Board.102"
NetModule1_103: "Carrier CM4 Dev IO Board.103" USB.D- | length 16
  Top Layer w0.2: USB.D- 11.871,26.071 11.681,25.881 11.681,23.171 12.011,22.841 13.881,22.841 16.531,20.191 19.331,20.191 20.741,21.601 21.521,21.601
NetModule1_105: "Carrier CM4 Dev IO Board.105" USB.D+ | length 10.3
  Top Layer w0.2: USB.D+ 16.736,20.591 19.181,20.591 20.591,22.001 21.521,22.001
NetModule1_109: "Carrier CM4 Dev IO Board.109"
NetModule1_110: "Carrier CM4 Dev IO Board.110"
NetModule1_111: "Carrier CM4 Dev IO Board.111"
NetModule1_112: "Carrier CM4 Dev IO Board.112"
NetModule1_116: "Carrier CM4 Dev IO Board.116"
NetModule1_118: "Carrier CM4 Dev IO Board.118"
NetModule1_122: "Carrier CM4 Dev IO Board.122"
NetModule1_124: "Carrier CM4 Dev IO Board.124"
NetR6_2: R6.2 SDCard.10 | length 10.9
  Top Layer w0.2: SDCard.10 13.931,8.521 24.463,8.521 R6.2
NetR7_2: R7.2 SDCard.9 | length 16.4
  Top Layer w0.2: SDCard.9 17.091,7.921 22.291,7.921 23.351,6.861 26.081,6.861 27.181,7.961 R7.2
NPWR_LED: "Carrier CM4 Dev IO Board.95" U1.2 | length 9.6
  Top Layer w0.2: 55.441,40.001 56.351,40.001 57.601,41.251 62.161,41.251 62.371,41.461 62.371,42.561 62.571,42.761 U1.2
NRPIBOOT: "Carrier CM4 Dev IO Board.93" J3.2 | length 37.3
  Top Layer w0.2: 55.441,39.601 57.101,39.601 v2(57.331,39.831)
  Bottom Layer w0.2: v2(57.331,39.831) 59.381,37.781 59.381,10.101 59.861,9.621 61.791,9.621 63.091,8.321 J3.2
RUN_PG: "Carrier CM4 Dev IO Board.92" J2.3 | length 22.4
  Top Layer w0.2: 52.361,39.201 49.988,39.201 49.487,39.702 49.487,43.267 60.341,54.121 J2.3
SD_CLK: "Carrier CM4 Dev IO Board.57" SDCard.5 | length 69.1
  Top Layer w0.2: SDCard.5 1.216,10.621 v2(2.531,10.621) ; 55.441,32.401 56.481,32.401 57.341,31.541 v2(58.321,31.541)
  Bottom Layer w0.2: v2(2.531,10.621) 37.401,10.621 v2(58.321,31.541)
SD_CMD: "Carrier CM4 Dev IO Board.62" SDCard.3 | length 61.4
  Top Layer w0.2: SDCard.3 7.991,8.461 10.021,10.491 28.421,10.491 51.131,33.201 52.361,33.201
SD_DAT0: "Carrier CM4 Dev IO Board.63" SDCard.7 | length 66.9
  Top Layer w0.2: SDCard.7 2.421,12.861 v2(2.451,12.891) ; 55.441,33.601 56.591,33.601 57.041,33.151 v2(57.441,33.151)
  Bottom Layer w0.2: v2(2.451,12.891) 37.181,12.891 v2(57.441,33.151)
SD_DAT1: "Carrier CM4 Dev IO Board.67" SDCard.8 | length 66
  Top Layer w0.2: SDCard.8 2.351,13.961 v2(2.361,13.971) ; 55.441,34.401 56.248,34.401 56.668,33.981 v2(57.091,33.981)
  Bottom Layer w0.2: v2(2.361,13.971) 37.081,13.971 v2(57.091,33.981)
SD_DAT2: "Carrier CM4 Dev IO Board.69" SDCard.1 | length 72.3
  Top Layer w0.2: SDCard.1 8.061,6.261 11.161,3.161 15.491,3.161 17.077,1.575 23.264,1.575 v2(36.831,15.141) ; 55.441,34.801 56.441,34.801 56.541,34.901 v2(56.541,34.851) v2@56.581,34.811
  Bottom Layer w0.2: v2(36.831,15.141) v2(56.541,34.851)
SD_DAT3: "Carrier CM4 Dev IO Board.61" SDCard.2 | length 69.9
  Top Layer w0.2: SDCard.2 7.901,7.361 10.361,9.821 29.121,9.821 v2(31.041,11.741) ; 55.441,33.201 56.361,33.201 57.221,32.341 v2(57.891,32.341)
  Bottom Layer w0.2: v2(31.041,11.741) 37.171,11.741 57.771,32.341 v2(57.891,32.341)
SD_DET: "Carrier CM4 Dev IO Board.76" R7.1 | length 34.9
  Top Layer w0.2: R7.1@27.361,12.181 51.181,36.001 52.361,36.001
SD_PWR_ON: "Carrier CM4 Dev IO Board.75"
SYNC_IN: "Carrier CM4 Dev IO Board.16"
SYNC_OUT: "Carrier CM4 Dev IO Board.18"
TRD0_N: "Carrier CM4 Dev IO Board.10"
TRD0_P: "Carrier CM4 Dev IO Board.12"
TRD1_N: "Carrier CM4 Dev IO Board.6"
TRD1_P: "Carrier CM4 Dev IO Board.4"
TRD2_N: "Carrier CM4 Dev IO Board.9"
TRD2_P: "Carrier CM4 Dev IO Board.11"
TRD3_N: "Carrier CM4 Dev IO Board.5"
TRD3_P: "Carrier CM4 Dev IO Board.3"
WL_NDIS: "Carrier CM4 Dev IO Board.89" J1.1 | length 17.7
  Top Layer w0.2: 55.441,38.801 58.191,38.801 v2(58.831,39.441)
  Bottom Layer w0.13: v2(58.831,39.441) 59.366,39.976 59.366,44.686 J1.1
pads on no net: "Carrier CM4 Dev IO Board.19" "Carrier CM4 Dev IO Board.64" "Carrier CM4 Dev IO Board.68" "Carrier CM4 Dev IO Board.70" "Carrier CM4 Dev IO Board.72" "Carrier CM4 Dev IO Board.73" "Carrier CM4 Dev IO Board.104" "Carrier CM4 Dev IO Board.106" "Carrier CM4 Dev IO Board.Un1" "Carrier CM4 Dev IO Board.Un2" "Carrier CM4 Dev IO Board.Un3" "Carrier CM4 Dev IO Board.Un4" GPIO.5 HDMI.14 U1.1 USB.P1 USB.P22 VIT.VIT1

## Polygon pours and split planes (outlines as drawn)
GND on Top Layer "GND" (solid, pour order 0): 3.616,59.351 2.244,59.351 2.026,59.351 ccw(c2.026,56.811) 0.23,58.607 -0.261,58.115 -0.39,57.987 ccw(c1.406,56.19) -1.134,56.19 -1.134,55.287 -1.134,2.072 ccw(c0.947,2.072) -0.524,0.601 0.281,-0.205 ccw(c2.077,1.591) 2.077,-0.949 3.971,-0.949 64.819,-0.949 ccw(c64.819,1.591) 66.615,-0.205 67.421,0.601 ccw(c65.949,2.072) 68.03,2.072 68.03,5.935 68.03,56.241 ccw(c65.49,56.241) 67.286,58.037 66.871,58.453 66.717,58.607 ccw(c64.921,56.811) 64.921,59.351 63.306,59.351 3.26,59.351
GND on Bottom Layer "GND" (solid, pour order 4): 3.641,59.351 2.27,59.351 2.052,59.351 ccw(c2.052,56.811) 0.256,58.607 -0.236,58.115 -0.365,57.987 ccw(c1.431,56.19) -1.109,56.19 -1.109,55.287 -1.109,2.072 ccw(c0.973,2.072) -0.499,0.601 0.306,-0.205 ccw(c2.103,1.591) 2.103,-0.949 3.997,-0.949 64.845,-0.949 ccw(c64.845,1.591) 66.641,-0.205 67.446,0.601 ccw(c65.974,2.072) 68.056,2.072 68.056,5.935 68.056,56.241 ccw(c65.516,56.241) 67.312,58.037 66.896,58.453 66.742,58.607 ccw(c64.946,56.811) 64.946,59.351 63.331,59.351 3.286,59.351

## Keep-outs
Keep-Out Layer:
  lines w0.254: 7.451,59.351 2.244,59.351 ; 2.244,59.351 ccw(c2.244,56.285) 0.076,58.453 -0.261,58.115 ccw(c1.907,55.947) -1.159,55.947 -1.159,2.429 -1.159,2.195 ccw(c1.341,2.195) -0.427,0.427 0,0 ccw(c2.168,2.168) 2.168,-0.898 64.754,-0.898 ccw(c64.754,2.168) 66.922,0 67.132,0.211 ccw(c64.964,2.379) 68.03,2.379 68.03,56.023 ccw(c64.964,56.023) 67.132,58.191 66.871,58.453 ccw(c64.703,56.285) 64.703,59.351 2.244,59.351

## Other copper
Top Layer:
  pour cut-out: 49.742,58.792 49.742,51.832 36.229,51.832 36.229,58.792
  region net +5V: 6.831,52.061 6.841,52.051 6.841,51.231 8.106,49.966 8.106,46.526 8.42,46.212 11.058,46.212 11.141,46.301 11.121,46.321 11.121,46.501 10.801,46.821 9.168,46.821 8.891,47.037 8.891,50.861 7.759,51.993
  region net +5V: 14.18,46.374 15.809,48.231 20.54,48.231 20.703,48.068 20.703,46.374 20.618,46.289 15.046,46.289
Bottom Layer:
  pour cut-out: 36.229,58.817 36.229,51.858 49.742,51.858 49.742,58.817

## Silkscreen, mask and mechanical layers (free items; w line width, h text height)
Top Overlay:
  text "VITECH" at 27.187,34.052 h5
  text "Solutions" at 34.578,32.63 h2
  text "_" at 65.973,29.404 h2 r90
  text "G12" at 57.195,24.592 h1
  text "G24" at 65.354,24.536 h1
  text "G23" at 65.354,21.895 h1
  text "G16" at 57.942,21.869 h1
  text "G18" at 65.354,19.431 h1
  text "G20" at 57.943,19.406 h1
  text "G15" at 65.354,16.789 h1
  text "G21" at 58.064,16.561 h1
  text "G14" at 65.354,14.402 h1
  text "NC" at 58.039,14.376 h1

## Dimensions
1.711,59.376 to -1.718,-0.822 on Top Overlay
-0.904,58.817 to 68.132,59.097 on Top Overlay

## Text inside footprints (layer, text, board x,y; h text height)
C2: Mechanical 6 "${REFERENCE}" at 7.369,56.707 h0.8
C3: Mechanical 6 "${REFERENCE}" at 7.369,54.547 h0.8
C4: Mechanical 6 "${REFERENCE}" at 7.369,52.387 h0.8
C5: Mechanical 6 "${REFERENCE}" at 15.775,12.34 h0.8 r90
J1: Mechanical 6 "${REFERENCE}" at 61.118,50.352 h0.8
J2: Mechanical 6 "${REFERENCE}" at 61.118,54.162 h0.8
J3: Mechanical 6 "${REFERENCE}" at 60.384,9.202 h0.8
L1: Top Overlay "A" at 59.783,2.976 h0.8 r180; Top Overlay "K" at 64.496,3.051 h0.8 r180
L2: Top Overlay "A" at 64.108,47.546 h0.8; Top Overlay "K" at 59.396,47.471 h0.8
L3: Top Overlay "A" at 59.703,39.816 h0.8 r180; Top Overlay "K" at 64.416,39.891 h0.8 r180
R3: Mechanical 6 "${REFERENCE}" at 13.462,52.726 h0.8 r180
R4: Mechanical 6 "${REFERENCE}" at 13.492,54.956 h0.8 r180
SDCard: Mechanical 6 "${REFERENCE}" at 7.887,10.379 h0.8 r270; Mechanical 7 "KEEPOUT" at 1.888,8.334 h0.8 r270
U1: Mechanical 6 "${REFERENCE}" at 62.505,41.88 h0.8 r90
USB: Mechanical 3 "AMP 787616-1" at 0.901,30.151 h0.8 r270